# EAGLE board ADC_AD7761BSTZ (EAGLE 9.5.2)
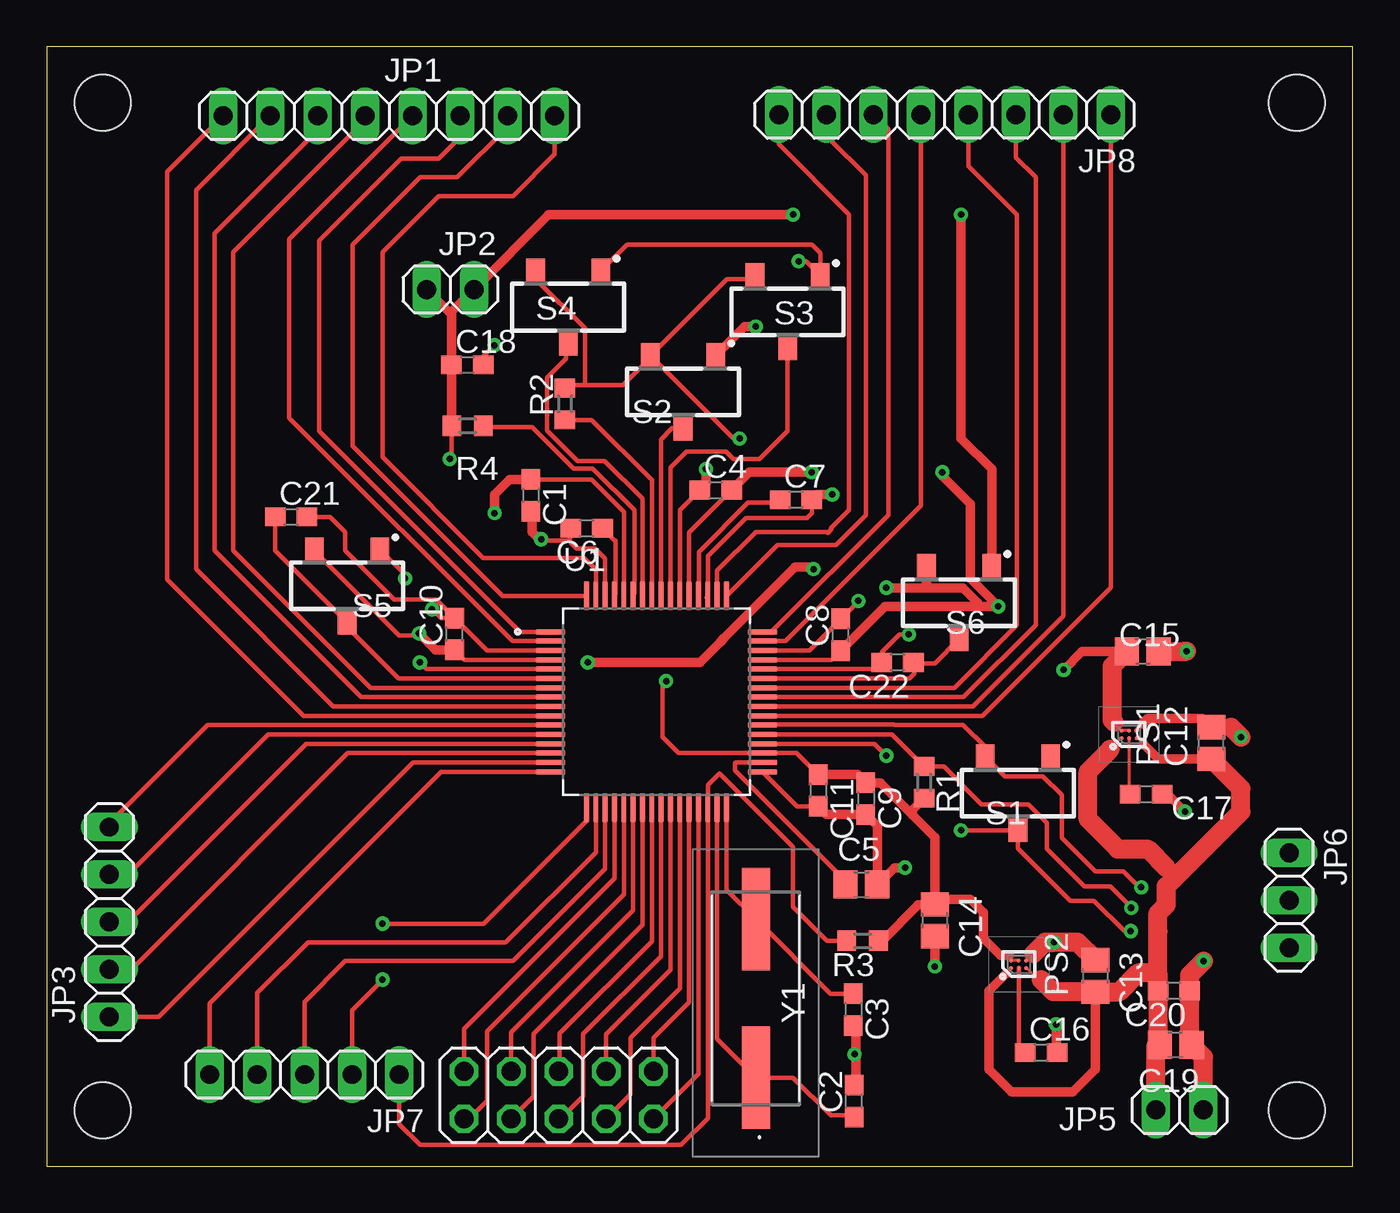
[diagram p0: board, top side]
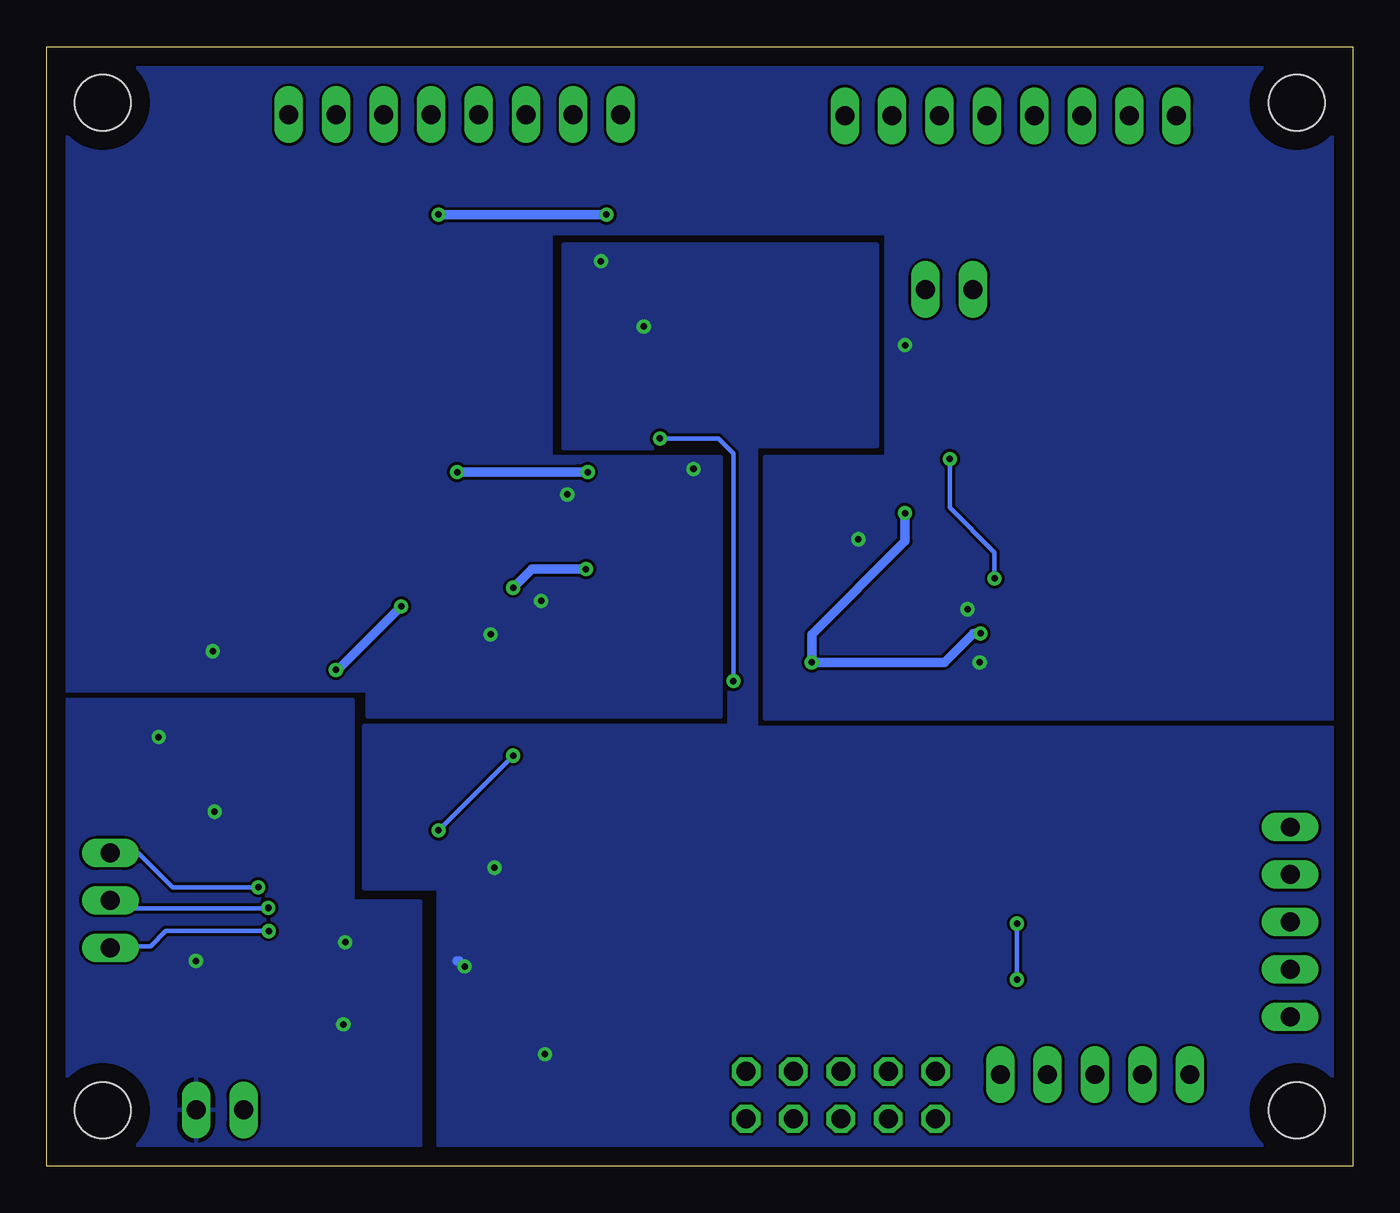
[diagram p1: board, bottom side, seen from below]

Size 70 x 60 mm. Coordinates in mm from the lower left corner, seen from the top.
Outline: 0,0 70,0 70,60 0,60 0,0
Copper layers (1*16): Top 0.035mm / dielectric 1.5mm / Bottom 0.035mm
Design rules "default": minimum track width 6mil, minimum drill 0.35mm, track to track 6mil, track to pad 6mil, pad to pad 6mil, via to via 6mil, smd to smd 6mil, copper to edge 40mil, drill to drill 6mil, minimum pad ring 10mil, minimum via ring 8mil, stop-mask expansion 4mil, vias tented up to drill 0mil, thermal gap 10mil
Holes 3 mm at 3,3 3,57 67,57 67,3

## Footprints (pad centres in the part's own frame; a part is rotated, then mirrored left to right if it is on the bottom)
C1608 = smd 1.1 x 1: 1 -0.85,0; 2 0.85,0
C2012 = smd 1.3 x 1.5: 1 -0.85,0; 2 0.85,0
1X08 = drill 1.016 long: 1 -8.89,0; 2 -6.35,0; 3 -3.81,0; 4 -1.27,0; 5 1.27,0; 6 3.81,0; 7 6.35,0; 8 8.89,0
1X02 = drill 1.016 long: 1 -1.27,0; 2 1.27,0
1X05 = drill 1.016 long: 1 -5.08,0; 2 -2.54,0; 3 0,0; 4 2.54,0; 5 5.08,0
2X05 = drill 1.016 octagon: 1 -5.08,-1.27; 2 -5.08,1.27; 3 -2.54,-1.27; 4 -2.54,1.27; 5 0,-1.27; 6 0,1.27; 7 2.54,-1.27; 8 2.54,1.27; 9 5.08,-1.27; 10 5.08,1.27
1X03 = drill 1.016 long: 1 -2.54,0; 2 0,0; 3 2.54,0
BGA6C40P2X3_95X116X56 = smd 0.208 x 0.208: A1 -0.2,0.4; A2 0.2,0.4; B1 -0.2,0; B2 0.2,0; C1 -0.2,-0.4; C2 0.2,-0.4
R0603 = smd 1 x 1.1: 1 -0.85,0; 2 0.85,0
B-TYPE = smd 1 x 1.3: 1 -1.75,-1.95; 2 0,1.95; 3 1.75,-1.95
QFP50P1200X1200X160-64N = smd 1.56 x 0.28: 1 -5.68,3.75; 2 -5.68,3.25; 3 -5.68,2.75; 4 -5.68,2.25; 5 -5.68,1.75; 6 -5.68,1.25; 7 -5.68,0.75; 8 -5.68,0.25; 9 -5.68,-0.25; 10 -5.68,-0.75; 11 -5.68,-1.25; 12 -5.68,-1.75; 13 -5.68,-2.25; 14 -5.68,-2.75; 15 -5.68,-3.25; 16 -5.68,-3.75; 33 5.68,-3.75; 34 5.68,-3.25; 35 5.68,-2.75; 36 5.68,-2.25; 37 5.68,-1.75; 38 5.68,-1.25; 39 5.68,-0.75; 40 5.68,-0.25; 41 5.68,0.25; 42 5.68,0.75; 43 5.68,1.25; 44 5.68,1.75; 45 5.68,2.25; 46 5.68,2.75; 47 5.68,3.25; 48 5.68,3.75 | smd 0.28 x 1.56: 17 -3.75,-5.68; 18 -3.25,-5.68; 19 -2.75,-5.68; 20 -2.25,-5.68; 21 -1.75,-5.68; 22 -1.25,-5.68; 23 -0.75,-5.68; 24 -0.25,-5.68; 25 0.25,-5.68; 26 0.75,-5.68; 27 1.25,-5.68; 28 1.75,-5.68; 29 2.25,-5.68; 30 2.75,-5.68; 31 3.25,-5.68; 32 3.75,-5.68; 49 3.75,5.68; 50 3.25,5.68; 51 2.75,5.68; 52 2.25,5.68; 53 1.75,5.68; 54 1.25,5.68; 55 0.75,5.68; 56 0.25,5.68; 57 -0.25,5.68; 58 -0.75,5.68; 59 -1.25,5.68; 60 -1.75,5.68; 61 -2.25,5.68; 62 -2.75,5.68; 63 -3.25,5.68; 64 -3.75,5.68
HCM4932768000ABJT = smd 5.5 x 1.5: 1 -4.25,0; 2 4.25,0

## Placement (x,y rotation side)
C1  0.1u  [C1608]  25.94,35.96 270 top
C2  22p  [C1608]  43.28,3.49 90 top
C3  22p  [C1608]  43.22,8.39 270 top
C4  0.1u  [C1608]  35.86,36.24 0 top
C5  10u  [C2012]  43.66,15.09 0 top
C6  1u  [C1608]  28.94,34.18 180 top
C7  1u  [C1608]  40.15,35.72 0 top
C8  0.1u  [C1608]  42.56,28.48 90 top
C9  0.1u  [C1608]  43.9,19.7 270 top
C10  0.1u  [C1608]  21.86,28.52 90 top
C11  1u  [C1608]  41.34,20.14 270 top
C12  10u  [C2012]  62.41,22.68 90 top
C13  10u  [C2012]  56.19,10.2 270 top
C14  10u  [C2012]  47.59,13.18 270 top
C15  10u  [C2012]  58.74,27.59 0 top
C16  1000p  [C1608]  53.29,6.09 0 top
C17  1000p  [C1608]  58.92,19.94 0 top
C18  0.1u  [C1608]  22.54,42.94 0 top
C19  10u  [C2012]  60.5,6.5 180 top
C20  0.1u  [C1608]  60.4,9.4 180 top
C21  0.1u  [C1608]  13.1,34.8 0 top
C22  0.1u  [C1608]  45.6,27 180 top
JP1  [1X08]  18.34,56.29 0 top
JP2  [1X02]  21.63,46.99 0 top
JP3  [1X05]  3.36,13.09 90 top
JP4  [2X05]  27.44,3.81 0 top
JP5  [1X02]  60.72,3.01 180 top
JP6  [1X03]  66.59,14.25 270 top
JP7  [1X05]  13.82,4.91 180 top
JP8  [1X08]  48.13,56.36 180 top
PS1  ADP7112ACBZ-5.0-R7  [BGA6C40P2X3_95X116X56]  58,23.14 90 top
PS2  ADP7112ACBZ-3.3-R7  [BGA6C40P2X3_95X116X56]  52.1,10.82 90 top
R1  10k  [R0603]  47.02,20.57 270 top
R2  10k  [R0603]  27.78,40.85 90 top
R3  10k  [R0603]  43.73,12.08 180 top
R4  50  [R0603]  22.56,39.68 180 top
S1  CJS-1200TB  [B-TYPE]  52.05,19.99 180 top
S2  CJS-1200TB  [B-TYPE]  34.1,41.5 180 top
S3  CJS-1200TB  [B-TYPE]  39.71,45.79 180 top
S4  CJS-1200TB  [B-TYPE]  27.95,46.04 180 top
S5  CJS-1200TB  [B-TYPE]  16.1,31.1 180 top
S6  CJS-1200TB  [B-TYPE]  48.9,30.2 180 top
U1  AD7761BSTZ  [QFP50P1200X1200X160-64N]  32.68,24.89 0 top
Y1  HCM4932768000ABJT  [HCM4932768000ABJT]  38,9 90 top

## Library data of the parts
C1-C22 = rcl; SPICEPREFIX: C
JP1-JP8 = pinhead
PS1 PS2 = ADP7112ACBZ-3.3-R7; ARROW_PART_NUMBER: ADP7112ACBZ-3.3-R7; DESCRIPTION: LDO Voltage Regulators 20V 200mA LDO 3.3Vo; HEIGHT: 0.56mm; MANUFACTURER_NAME: Linear Technology; MANUFACTURER_PART_NUMBER: ADP7112ACBZ-3.3-R7; MOUSER_PART_NUMBER: 584-ADP7112ACBZ3.3R7; MOUSER_PRICE-STOCK: https://www.mouser.com/Search/Refine.aspx?Keyword=584-ADP7112ACBZ3.3R7
R1-R4 = rcl; SPICEPREFIX: R
S1-S6 = CJS-1200TB; ARROW_PART_NUMBER: CJS-1200TB; DESCRIPTION: SMD Slide Switch, 1-Pole (SPDT); HEIGHT: mm; MANUFACTURER_NAME: Copal Electronics; MANUFACTURER_PART_NUMBER: CJS-1200TB
U1 = AD7761BSTZ; ARROW_ELECTRONICS-PURCHASE-URL: https://snapeda.com/shop?store=Arrow+Electronics&id=598466; DESCRIPTION: 16 Bit Analog to Digital Converter 8 Input 8 Sigma-Delta 64-LQFP (10x10); DIGIKEY-PURCHASE-URL: https://snapeda.com/shop?store=DigiKey&id=598466; MF: Analog Devices; MOUSER-PURCHASE-URL: https://snapeda.com/shop?store=Mouser&id=598466; MP: AD7761BSTZ; PACKAGE: LQFP -64 Analog Devices
Y1 = HCM49; DESCRIPTION: Crystals 32.768MHz 18pF; HEIGHT: 4.3mm; MANUFACTURER_NAME: Citizen Finetech Miyota; MANUFACTURER_PART_NUMBER: HCM4932768000ABJT; MOUSER_PART_NUMBER: 695-HCM49-327-U; MOUSER_PRICE-STOCK: https://www.mouser.com/Search/Refine.aspx?Keyword=695-HCM49-327-U

## Nets
+9V: C12.1 C13.2 C19.2 C20.2 JP5.2 PS1.A1 PS1.C1 PS2.A1 PS2.C1
AGND: C1.2 C4.1 C6.2 C7.2 C8.2 C10.2 C15.2 C18.2 C21.2 C22.2 U1.3 U1.5 U1.44 U1.46 U1.51 U1.54 U1.62
AIN0+: JP1.7 U1.64
AIN0-: JP1.8 U1.63
AIN1+: JP1.5 U1.2
AIN1-: JP1.6 U1.1
AIN2+: JP1.3 U1.8
AIN2-: JP1.4 U1.7
AIN3+: JP1.1 U1.10
AIN3-: JP1.2 U1.9
AIN4+: JP8.7 U1.49
AIN4-: JP8.8 U1.50
AIN5+: JP8.5 U1.47
AIN5-: JP8.6 U1.48
AIN6+: JP8.3 U1.41
AIN6-: JP8.4 U1.42
AIN7+: JP8.1 U1.39
AIN7-: JP8.2 U1.40
DGND: C2.2 C3.2 C5.2 C9.2 C11.2 C14.2 S2.1 S3.1 S4.1 U1.33
GND: C12.2 C13.1 C16.2 C17.2 C19.1 C20.1 JP5.1 PS1.C2 PS2.C2
N$1: JP7.4 U1.18
N$2: JP7.3 U1.19
N$3: JP7.5 U1.16
N$4: JP7.2 U1.17
N$5: C2.1 U1.31 Y1.1
N$6: JP6.2 R1.1 U1.37
N$7: C3.1 U1.32 Y1.2
N$8: JP3.5 U1.11
N$9: JP3.4 U1.12
N$10: JP3.3 U1.13
N$11: JP3.2 U1.14
N$12: JP3.1 U1.15
N$13: C16.1 PS2.B1
N$14: C7.1 U1.52
N$15: JP4.2 U1.20
N$16: JP4.1 U1.21
N$17: JP4.4 U1.22
N$18: JP4.3 U1.23
N$19: JP4.6 U1.24
N$20: JP4.5 U1.25
N$21: JP4.8 U1.26
N$22: JP4.7 U1.27
N$23: JP4.10 U1.28
N$24: JP4.9 U1.29
N$25: C5.1 U1.34
N$26: R2.1 U1.57
N$27: C6.1 U1.61
N$28: JP6.3 S1.2 U1.36
N$29: S4.2 U1.58
N$30: JP6.1 S1.3 U1.38
N$31: S2.2 U1.56
N$32: S3.2 U1.55
N$33: R4.1 U1.59
N$34: C17.1 PS1.B1
N$35: JP7.1 R3.2 U1.30
N$36: C22.1 S6.2 U1.43
N$37: C21.1 S5.2 U1.6
VCC: C1.1 C4.2 C8.1 C10.1 C15.1 PS1.A2 PS1.B2 S5.3 S6.3 U1.4 U1.45 U1.53 U1.60
VCC/2: C18.1 JP2.1 JP2.2 R4.2 S5.1 S6.1
VDD: C9.1 C11.1 C14.1 PS2.A2 PS2.B2 R1.2 R2.2 R3.1 S2.3 S3.3 S4.3 U1.35

## Tracks (layer width: path | path; a pad name or v marks a point on that pad's centre or on a via)
+9V
  Top 0.152: 53.12,10 PS2.C1 | 57,22.34 PS1.A1 | 51.4,10.3 51.7,10.6 PS2.A1 | 58.8,22.6 58.46,22.94 PS1.C1
  Top 0.254: 60,16 60.35,16.05 60.7,15.7 | 53.3,10 53.12,10
  Top 0.508: C19.2 59.55,6.5 59.45,6.5 | C13.2 56.19,5.19 55,4 51.7,4 50.5,5.2 50.5,9.4 51.4,10.3 | C12.1 59.57,21.83 58.8,22.6
  Top 1.016: JP5.2 59.45,6.1 59.45,6.5 | C20.2 59.55,6.55 59.55,6.5 | C12.1 64,20.24 64,19 60.83,15.83 60.7,15.7 60,15 60,14 59.55,13.55 59.55,12.6 C20.2 | 60,16 59,17 57.4,17 55.8,18.6 55.8,21.14 57,22.34 | C20.2 59.55,10.3 59.5,10.35 58.49,10.35 57.49,9.35 C13.2 53.95,9.35 53.3,10
AGND  (via drill 0.35)
  Top 0.254: U1.3 23.59,27.64 C10.2 | C21.2 15.2,34.8 16,34 16,33 18.63,30.37 20.86,30.37 C10.2 | U1.54 33.93,35.16 C4.1 35.15,36.37 35.15,36.58 35.34,36.58 | U1.62 29.93,32.57 29.4,33.1 28.4,33.1 28.09,33.41 28.04,33.53 | v24,44 23.45,43.45 23.39,43.39 23.37,43.28 23.37,43.08 C18.2 | C10.2 21.13,29.37 v20.65,29.85 | U1.5 20.36,26.64 v20,27 | 43.42,30.19 C8.2 40.87,27.64 U1.46 | 43.42,30.19 43.5,30.27 | v46.2,28.5 45.7,28.5 44.75,27.55 C22.2 44.39,26.64 U1.44 | 40,34.74 37.47,34.74 35.44,32.71 35.44,30.63 U1.51 35.36,30.48 U1.51 | 40,34.74 40.08,34.74 | 40,34.74 40.74,34.74 41,35 C7.2 | 28.04,33.53 28.04,34.14 C6.2 | 26.34,33.66 26.42,33.73 v26.5,33.6 26.62,33.53 28.04,33.53 | 26,34.95 26.01,34.95 C1.2 | 60.96,27.59 60.96,27.64 v61.1,27.6 | 43.42,30.19 43.48,30.28 v43.5,30.3
  Top 0.508: 35.34,36.56 35.34,36.58 v35.34,37.37 | 26,35.05 26,34.95 26,34 26.34,33.66 26.4,33.6 | C7.2 41.28,36 v42.1,36
  Top 1.016: C15.2 60.96,27.59 v61.09,27.59
  pour Bottom: 0,60 0,24 31.5,24 31.5,38 25,38 25,50 43,50 43,38 33.9,38 33.9,24.1 52.8,24.1 52.8,25.5 70,25.5 70,60
AIN0+
  Top 0.254: JP1.7 24.69,55.69 22,53 20,53 16.4,49.4 16.4,38.6 24.43,30.57 U1.64
AIN0-
  Top 0.254: JP1.8 27.23,54.23 25,52 21,52 18,49 18,38 23.4,32.6 28.8,32.6 29.43,31.97 U1.63
AIN1+
  Top 0.254: JP1.5 13,49.68 13,40.1 24.96,28.14 U1.2
AIN1-
  Top 0.254: JP1.6 22.15,55.15 21,54 19,54 14.6,49.6 14.6,39.4 25.36,28.64 U1.1
AIN2+
  Top 0.254: JP1.3 14.53,55.53 9,50 9,33 16.86,25.14 U1.8
AIN2-
  Top 0.254: JP1.4 17.07,56.07 10,49 10,33 17.36,25.64 U1.7
AIN3+
  Top 0.254: JP1.1 6.45,53.29 6.45,31.55 6.45,31.45 13.76,24.14 14.14,24.14 U1.10
AIN3-
  Top 0.254: JP1.2 8,52.3 8,32 15.36,24.64 U1.9
AIN4+
  Top 0.254: U1.49 39.16,33.3 42.3,33.3 43.9,34.9 43.9,53.1 42,55 42,56.14 JP8.7
AIN4-
  Top 0.254: U1.50 35.93,31.93 38,34 41.83,34 41.86,33.93 42.06,34.14 42.02,34.2 43,35.17 43,51 39.24,54.76 JP8.8
AIN5+
  Top 0.254: U1.47 39.59,28.14 46.86,35.41 JP8.5
AIN5-
  Top 0.254: JP8.6 45.1,55.58 45.1,34.9 38.86,28.66 38.38,28.66 U1.48
AIN6+
  Top 0.254: U1.41 49.14,25.14 53,29 53,53 51.94,54.06 JP8.3
AIN6-
  Top 0.254: U1.42 48.64,25.64 52,29 52,51 49.4,53.6 JP8.4
AIN7+
  Top 0.254: U1.39 50.14,24.14 57.02,31.02 JP8.1
AIN7-
  Top 0.254: U1.40 49.64,24.64 54.48,29.48 JP8.2
DGND  (via drill 0.35)
  Top 0.254: S4.1 30.71,49 31.11,49.4 41,49.4 41.46,48.94 S3.1 40.7,48.5 v40.3,48.5 | C11.2 40.21,19.29 U1.33
  Top 0.508: S2.1 37.4,45 v38,45 | C2.2 43.38,4.44 43.38,6 | 43.38,6 v43.3,6 | C3.2 43.38,7.38 43.38,6 | C11.2 41.78,18.85 C9.2 44.51,18.24 C5.2 45.42,16 v46,16 | C14.2 v47.59,10.71 v47.6,10.7
  Bottom 0.508: v47.6,10.7 47.9,11 48,11
  pour Bottom: 0,23.5 0,0 49,0 49,14.9 53,14.9 53,23.6 33.4,23.6 33.4,38.5 42.3,38.5 42.3,49.4 25.5,49.4 25.5,38.6 32,38.6 32,23.5
GND  (via drill 0.35)
  Top 0.152: PS2.C2 52.52,11.02 52.9,11.4
  Top 0.254: C17.2 59.94,20.12 60.06,19.94 | 58.7,23.7 58.7,23.64 PS1.C2
  Top 0.508: 60.06,19.94 v61,19 | C16.2 54.1,6.13 v54.1,7.6 | 63.5,23.5 62.44,23.5 C12.2 61.94,24 59,24 58.7,23.7
  Top 1.016: v62,11 61.25,10.25 C20.1 61.25,6.6 C19.1 61.99,5.86 JP5.1 | 63.47,23.53 63.5,23.5 v64,23 | C13.1 55.24,12 v54,12 | v54,12 53.7,12 | 52.9,11.4 53.5,12 v54,12
  pour Bottom: 70,0 70,25 53.6,25 53.6,14.2 50,14.2 50,0
N$1
  Top 0.254: U1.18 29.43,16.83 24.6,12 14,12 11.28,9.28 JP7.4
N$2
  Top 0.254: JP7.3 13.82,8.82 16,11 25,11 29.93,15.93 U1.19
N$3
  Top 0.254: U1.16 21.14,21.14 8.74,8.74 JP7.5
N$4  (via drill 0.35)
  Top 0.254: U1.17 28.93,18.51 23.42,13 v18,13 | v18,10 16.36,8.36 JP7.2
  Bottom 0.254: v18,13 v18,10
N$5
  Top 0.254: C2.1 43.19,2.73 42.02,2.73 40,4.75 Y1.1 35.93,6.82 U1.31
N$6  (via drill 0.35)
  Top 0.254: U1.37 45.3,23.14 R1.1 48.08,21.42 50.1,19.4 52.6,19.4 53.6,18.4 53.6,17 55.6,15 57,15 58.13,13.87 v58.13,13.84
  Bottom 0.254: JP6.2 66.17,13.83 58.31,13.83 58.3,13.84 v58.13,13.84
N$7
  Top 0.254: C3.1 42.01,9.24 Y1.2 36.43,14.82 U1.32
N$8
  Top 0.254: U1.11 8.64,23.64 3.36,18.36 JP3.5
N$9
  Top 0.254: JP3.4 4.36,15.63 11.87,23.14 U1.12
N$10
  Top 0.254: U1.13 13.91,22.64 4.36,13.09 JP3.3
N$11
  Top 0.254: U1.14 16.14,22.14 4.55,10.55 JP3.2
N$12
  Top 0.254: U1.15 19.64,21.64 6.01,8.01 JP3.1
N$13
  Top 0.254: PS2.B1 52.1,6.43 C16.1
N$14
  Top 0.254: C7.1 39.22,35.56 37.59,35.56 34.95,32.92 34.95,30.68 U1.52
N$15
  Top 0.254: U1.20 30.43,15.43 22.36,7.36 JP4.2
N$16
  Top 0.254: U1.21 30.93,14.55 23.6,7.22 23.6,3.5 22.64,2.54 JP4.1
N$17
  Top 0.254: JP4.4 24.9,7.19 31.43,13.72 U1.22
N$18
  Top 0.254: U1.23 31.93,12.93 26.1,7.1 26.1,3.74 JP4.3
N$19
  Top 0.254: U1.24 32.43,12.05 27.49,7.11 27.49,5.13 JP4.6
N$20
  Top 0.254: U1.25 32.92,19.1 32.92,11.25 28.75,7.08 28.75,3.76 27.64,2.64 JP4.5
N$21
  Top 0.254: U1.26 33.43,10.53 29.98,7.08 JP4.8
N$22
  Top 0.254: U1.27 33.93,19.1 33.93,9.53 31.29,6.88 31.29,3.86 30.07,2.64 JP4.7
N$23
  Top 0.254: U1.28 34.43,8.79 32.52,6.88 JP4.10
N$24
  Top 0.254: U1.29 34.93,4.95 JP4.9
N$25
  Top 0.254: U1.34 36.94,21.64 36.9,21.6 36.9,21.2 42.81,15.29 C5.1
N$26
  Top 0.254: U1.57 32.43,36.77 29.2,40 R2.1
N$27
  Top 0.254: C6.1 30.43,33.54 30.48,33.53 30.48,30.68 U1.61
N$28  (via drill 0.35)
  Top 0.254: U1.36 44.36,22.64 v45,22 | v49,18 52.01,18 S1.2 52.05,17.04 54.86,14.23 56.13,14.23 57.76,12.6 v58.1,12.6
  Bottom 0.254: JP6.3 66.45,11.79 64.43,11.79 63.62,12.6 v58.1,12.6 | v45,22 v49,18
N$29
  Top 0.254: S4.2 27.84,43.89 27.84,43.28 26.82,42.27 26.82,39.42 28.45,37.8 29.91,37.8 31.93,35.77 31.93,30.63 31.93,30.62 U1.58
N$30  (via drill 0.35)
  Top 0.254: U1.38 38.39,23.67 45.42,23.67 45.43,23.66 49.1,23.66 50.3,22.46 S1.3 51.34,20.9 53.4,20.9 54.4,19.9 54.4,17.6 56.2,15.8 57.71,15.8 58.56,14.95 v58.66,14.95
  Bottom 0.254: v58.66,14.95 63.25,14.95 65.09,16.79 JP6.1
N$31
  Top 0.254: S2.2 33.52,39.55 32.92,38.95 32.92,30.68 U1.56
N$32
  Top 0.254: U1.55 33.43,37.43 34.3,38.3 36.4,38.3 36.8,37.9 38.2,37.9 39.71,39.41 S3.2
N$33
  Top 0.254: R4.1 23.57,39.62 26.01,39.62 28.25,37.39 29.26,37.39 31.5,35.15 31.5,30.68 U1.59
N$34
  Top 0.152: PS1.B1 58,20.01 C17.1
N$35
  Top 0.254: R3.2 41.82,12.08 40,13.9 40,17.1 36.05,21.05 35.43,20.43 U1.30 35.43,2.57 34,1.14 20,1.14 18.9,2.24 JP7.1
N$36
  Top 0.254: U1.43 46.24,26.14 46.5,26.4 46.5,26.95 | S6.2 47.6,26.95 46.5,26.95 | C22.1 46.53,27.03 46.5,26.95
N$37
  Top 0.254: U1.6 18.86,26.14 16.1,28.9 S5.2 12.25,33 C21.1
VCC  (via drill 0.35)
  Top 0.152: PS1.B2 PS1.A2 57.2,23.74 57.2,23.8
  Top 0.254: U1.4 22.39,27.14 C10.1 | U1.53 34.43,33.96 C4.2 | C8.1 42.07,27.14 U1.45 | U1.60 30.93,35.07 30.19,35.81 29.19,36.81 C1.1 | S5.3 14.43,32.92 18.9,28.45 19.85,28.45 v19.96,28.56 | 47.15,31.09 47.14,31.09 47.14,31 | v41.1,32 41.25,32.11 41,32.1 | 49.78,30 49.78,30.07 49.91,30.2 | v48,37.2 48.16,37.19 48,37
  Top 0.508: 48,37 49.5,35.5 49.5,31.5 v51,30 50,30 49.84,30 49.78,30 44.93,30 C8.1 | v41,37.2 37.67,37.2 C4.2 | v29,27 30.94,27 35,27 36.08,28.08 36.31,28.31 40.1,32.1 41,32.1 | C1.1 24.81,36.81 24,36 v24,35 | v19.96,28.56 20.76,27.76 | 20.76,27.76 20.84,27.67 | v45,31 47.14,31 47.24,31 49.1,31 49.91,30.2 | S6.3 47.15,31.24 47.15,31.09 | C15.1 55.49,27.59 v54.5,26.6 | 20.76,27.76 20.84,27.67 | 20.84,27.67 C10.1
  Top 1.016: C15.1 57.1,26.8 57.1,23.9 57.2,23.8
  Bottom 0.254: v54.5,26.6 54.46,26.62 54.4,26.6 | v19.96,28.56 20.12,28.65 20.33,28.56
  Bottom 0.508: v48,37.2 41.6,37.2 v41,37.2 | v41.1,32 44,32 v45,31 | v24,35 24,33.5 29,28.5 v29,27 21.89,27 20.33,28.56 | 54.4,26.6 v51,30
VCC/2  (via drill 0.35)
  Top 0.254: R4.2 21.71,38.01 v21.6,37.9 | S5.1 19.2,31.7 v19.2,31.5
  Top 0.508: R4.2 21.71,42.92 | 21.71,42.92 C18.1 | 21.71,45.64 21.71,45.8 JP2.2 26.91,51 v40,51 | 21.71,42.92 21.71,45 21.71,45.64 | JP2.1 21.71,45.64 | v49,51 49,39 50.65,37.35 S6.1
  Bottom 0.254: v21.6,37.9 21.6,35.3 19.2,32.9 v19.2,31.5
  Bottom 0.508: v49,51 v40,51
VDD  (via drill 0.35)
  Top 0.152: PS2.B2 PS2.A2 51.7,11.2 51.6,11.3
  Top 0.254: v33.2,26 33,25.8 33,23 33.86,22.14 U1.35 40.19,22.14 C11.1 | 28.85,41.86 30.89,41.86 32.35,43.32 S2.3 | 28.85,41.86 27.84,41.86 R2.2 | 28.85,41.86 28.85,44.91 26.21,47.55 26.21,47.95 S4.3 | S3.3 37.8,47.55 36.45,47.55 S2.3 | v37.13,39 36.98,39.01 36.79,39.01 S2.3
  Top 0.508: C14.1 47.86,14.3 48.62,14.3 48.86,14.3 49.52,14.3 50.2,13.62 50.2,12.2 51.1,11.3 51.6,11.3 | 46.4,18.82 47.59,17.63 47.59,15.03 C14.1 | C14.1 47.56,14 46.7,14 44.78,12.08 R3.1 | 46.4,18.82 46.4,19.1 R1.2 | 46.4,18.82 44.67,20.55 C9.1 43.46,20.99 C11.1
  Bottom 0.254: v33.2,26 33.2,38.2 34,39 v37.13,39